# Altium PCB FEV-60_Motor_uC.PcbDoc
Units mil, origin at the board's own origin, x right, y up, seen from the top; angles counter-clockwise.
Board outline 2700 x 2125 mil, 2 copper layers (Top Layer, Bottom Layer); 35 components, 71 nets, 214 pads, 131 vias.
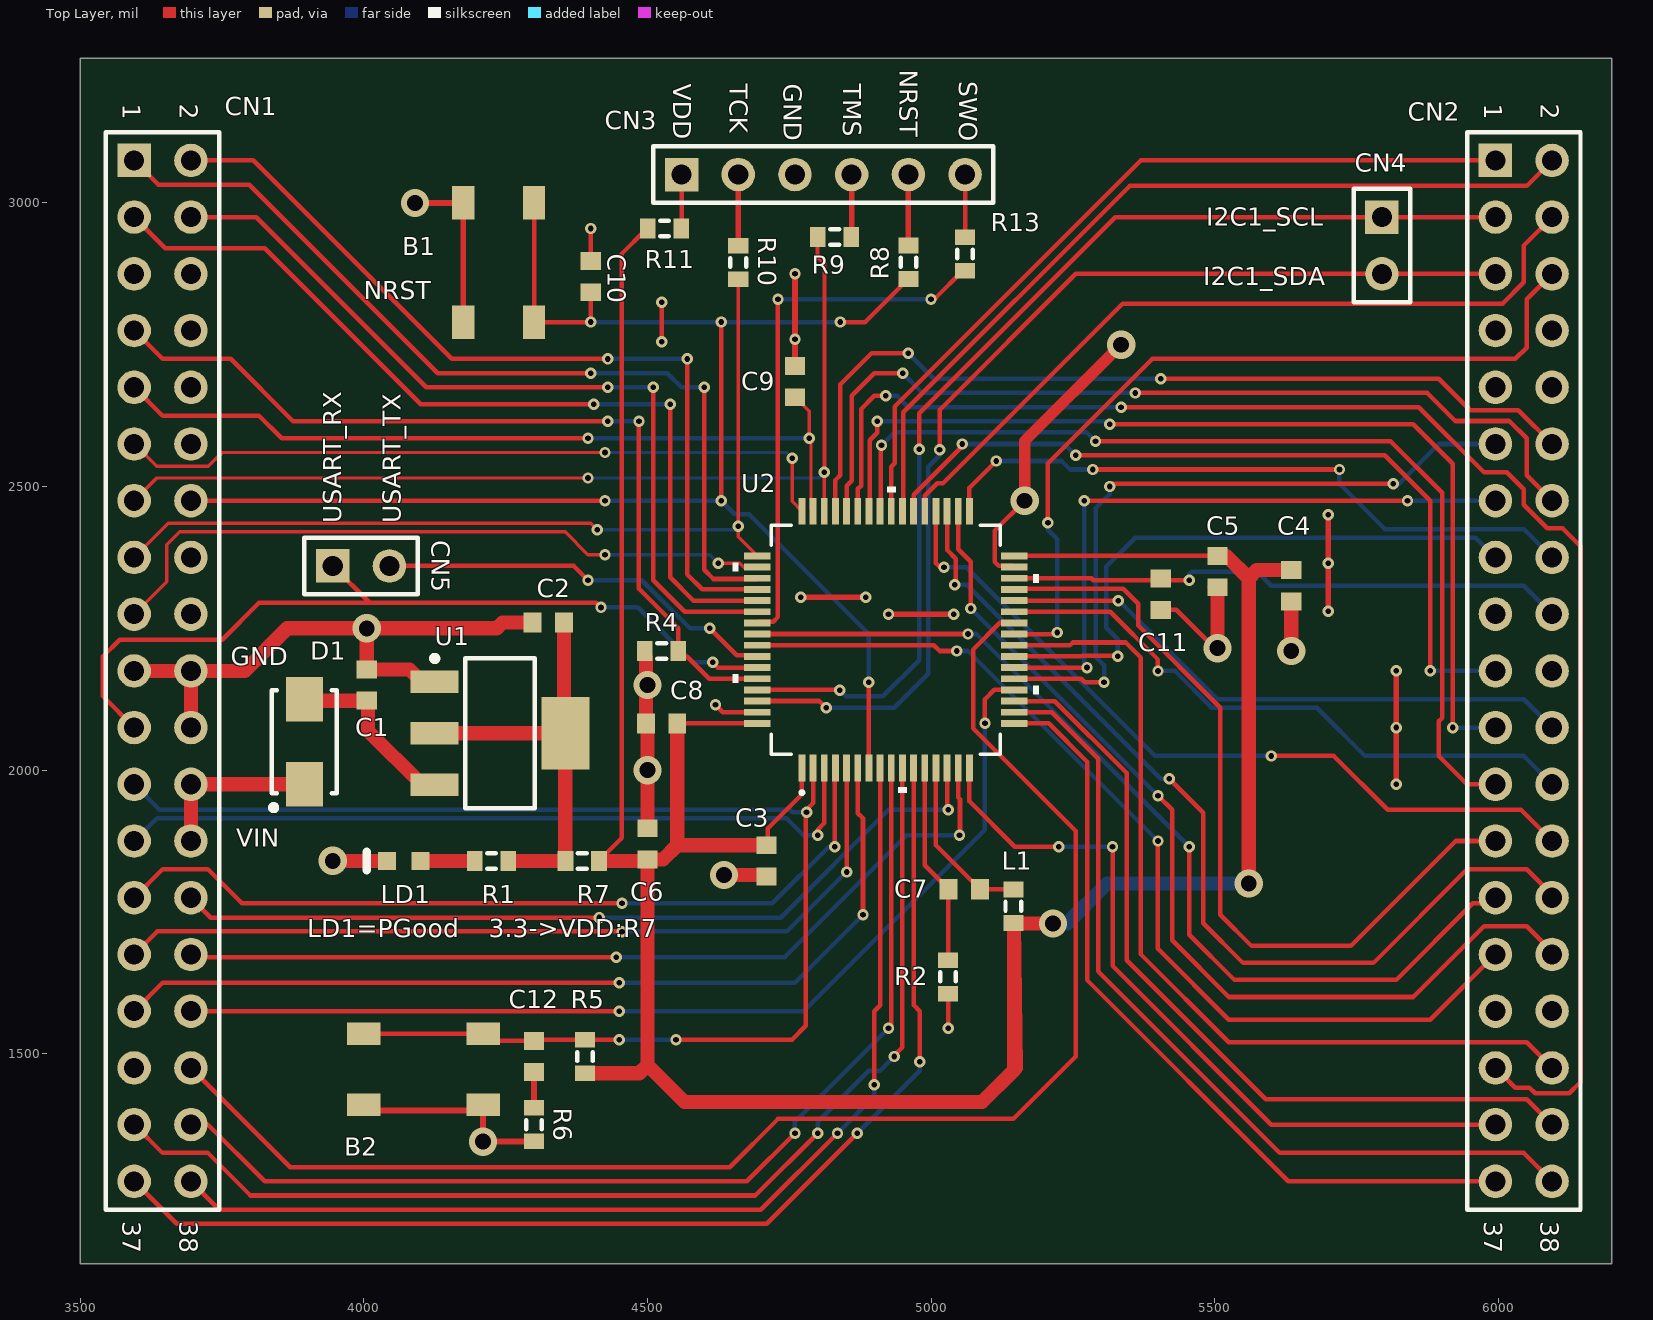
[diagram p0: Top Layer view]
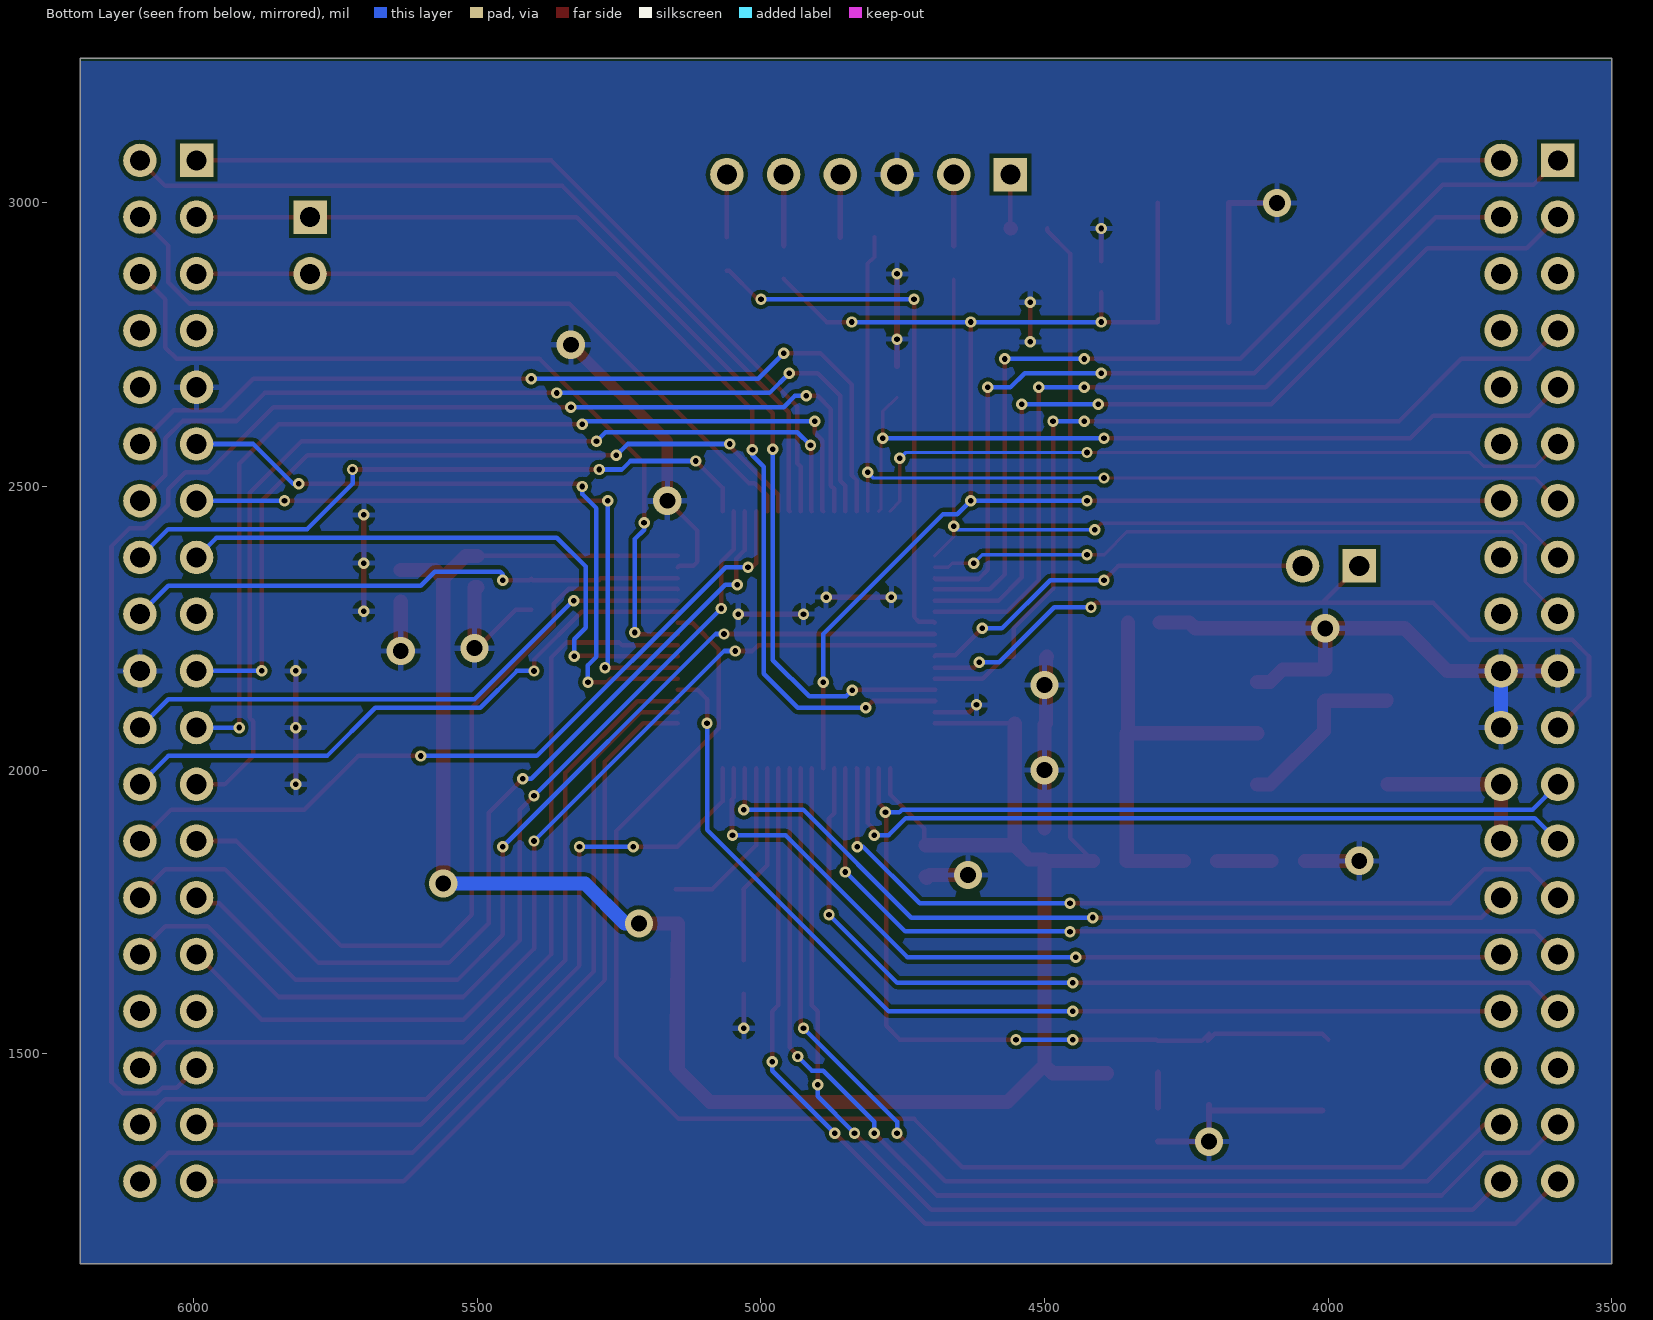
[diagram p1: Bottom Layer view, seen from below]

## Layer stack, top to bottom
Top Solder: solder mask 0.4, Solder Resist, Dk 3.5
Top Layer: signal copper 1.4
Dielectric 1: dielectric 12.6, FR-4, Dk 4.8
Bottom Layer: signal copper 1.4
Bottom Solder: solder mask 0.4, Solder Resist, Dk 3.5

## Board outline
3500,1130 3500,3255 6200,3255 6200,1130

## Design rules (kind name [scope] priority, off if disabled: settings)
Clearance [All] p1: gap=7 ignorepadtopadclearanceinfootprint=FALSE
HoleToHoleClearance [All] p1: gap=7 allowstackedmicrovias=TRUE
MinimumSolderMaskSliver [All] p1: minsoldermaskwidth=7
PolygonConnect [All] p1: connectstyle=Relief reliefconductorwidth=10 reliefentries=4 polygonreliefangle="90 Angle" airgapwidth=10
RoutingVias [All] p1: holewidth=28 width=50 viastyle="Through Hole" minholewidth=10 minwidth=20 maxholewidth=28 maxwidth=50
SilkToSilkClearance [All] p1: silktosilkclearance=8
SilkToSolderMaskClearance [IsPad] p1: minsilkscreentomaskgap=3.5 clearancetoexposedcopper=TRUE
SolderMaskExpansion [All] p1: expansion=4
Width [All] p1: maxlimit=50 minlimit=6 preferedwidth=10 minimp=50.000000 maximp=50.000000 favimp=50.000000
26 further rules are at their usual default settings.

## Components (designator, comment, footprint, x,y, rotation, side; value= is the part's Value field where it differs from the comment)
B1 "TD-0341 [RESET/Black]" Button 4175,2790 r90 top
B2 "USER (Blue)" Button 4210,1410 r180 top
C1 "Cap Semi" 1608[0603] 4005,2150 r270 top value=10uF
C2 "Cap Semi" 1608[0603] 4325,2260 r0 top value=10uF
C3 "Cap Semi" 1608[0603] 4710,1840 r90 top value=10uF
C4 "Cap Semi" 1608[0603] 5635,2325 r90 top value=10uF
C5 "Cap Semi" 1608[0603] 5505,2350 r90 top value=10uF
C6 "Cap Semi" 1608[0603] 4500,1870 r270 top value=10uF
C7 "Cap Semi" 1608[0603] 5058.58,1790 r0 top value=10uF
C8 "Cap Semi" 1608[0603] 4525,2082.36 r0 top value=10uF
C9 "Cap Semi" 1608[0603] 4760,2685 r270 top value=2.2uF
C10 "Cap Semi" 1608[0603] 4400,2870 r270 top value=100nF
C11 "Cap Semi" 1608[0603] 5405,2310 r90 top value=4.7uF
C12 "Cap Semi" 1608[0603] 4300,1495 r90 top value=100nF
CN1 "Header 19X2" HDR2X19 3595,3075 r270 top locked
CN2 "Header 19X2" HDR2X19 5995,3075 r270 top locked
CN3 "Header 6X1" HDR1X6 4560,3050 r0 top
CN4 "Header 2" HDR1X2 5795,2975 r270 top
CN5 "Header 2" HDR1X2 3945,2360 r0 top
D1 "STPS2L30A" STPS2L30A 3895,2050 r90 top
L1 "Res3" J1-0603 5145,1760 r90 top value=1K (schematic designator R?BEAD)
LD1 "HSMS-C190" AVAG-HSMX-C190_V 4070,1840 r180 top
R1 "Res3" J1-0603 4225,1840 r0 top value=1K
R2 "Res3" J1-0603 5030,1635.47 r90 top value=0
R4 "Res3" J1-0603 4525,2210 r0 top value=10K
R5 "Res3" J1-0603 4390,1495 r270 top value=4.7K
R6 "Res3" J1-0603 4300,1375 r90 top value=100
R7 "Res3" J1-0603 4385,1840 r180 top value=0
R8 "Res3" J1-0603 4960,2895.47 r270 top value=22
R9 "Res3" J1-0603 4830,2940 r180 top value=22
R10 "Res3" J1-0603 4660,2895 r270 top value=22
R11 "Res3" J1-0603 4530,2955 r180 top value=0
R13 "Res3" J1-0603 5060,2910 r270 top value=22
U1 "LD1117S33TR" LD1117S33TR 4240,2065 r0 top
U2 "MCU_LQFP64" STM32F030R8 4920,2230 r90 top

## Footprints (in the part's own frame and the unit in brackets; to place one, negate y for a bottom-side part, rotate by r counter-clockwise, add the part's x,y. Pads: shape width x height; smd on the part's side, far side on the other; paste and mask are expansions set on the pad)
1608[0603] [mm] "Chip Capacitor, Body 1.6x0.8mm, IPC High Density"
  rect 0.8x0.9 smd: 1(-0.7,0) 2(0.7,0)
  body extent -0.87,-0.48 0.87,0.48, height 1.3
AVAG-HSMX-C190_V [mm] "SMD, 2-Leads, Body 1.6x0.8mm, Height 0.9mm"
  rect 0.8x0.8 smd: 1(-0.75,0) 2(0.75,0)
  silkscreen extent 1.65,-0.4 1.65,0.4, body extent -0.8,-0.4 0.8,0.4, height 0.9
Button [mm]
  rect 1.5x1 smd: 1(0,0) 2(0,-3.175) 3(5.334,-3.175) 4(5.334,0)
HDR1X2 [mm] "Connector; Header; 2 Position"
  rect 1.5x1.5 hole 0.9: 1(0,0)
  round 1.5 hole 0.9: 2(2.54,0)
  silkscreen extent -1.27,-1.27 3.81,1.27
HDR1X6 [mm] "Connector; Header; 6 Position"
  rect 1.5x1.5 hole 0.9: 1(0,0)
  round 1.5 hole 0.9: 2(2.54,0) 3(5.08,0) 4(7.62,0) 5(10.16,0) 6(12.7,0)
  silkscreen extent -1.27,-1.27 13.97,1.27
HDR2X19 [mm] "Connector; Header; 19x2 Position"
  rect 1.5x1.5 hole 0.9: 1(0,0)
  round 1.5 hole 0.9: 2(0,2.54) 3(2.54,0) 4(2.54,2.54) 5(5.08,0) 6(5.08,2.54) 7(7.62,0) 8(7.62,2.54) 9(10.16,0) 10(10.16,2.54) 11(12.7,0) 12(12.7,2.54) 13(15.24,0) 14(15.24,2.54) 15(17.78,0) 16(17.78,2.54) 17(20.32,0) 18(20.32,2.54) 19(22.86,0) 20(22.86,2.54) 21(25.4,0) 22(25.4,2.54) 23(27.94,0) 24(27.94,2.54) 25(30.48,0) 26(30.48,2.54) 27(33.02,0) 28(33.02,2.54) 29(35.56,0) 30(35.56,2.54) 31(38.1,0) 32(38.1,2.54) 33(40.64,0) 34(40.64,2.54) 35(43.18,0) 36(43.18,2.54) 37(45.72,0) 38(45.72,2.54)
  silkscreen extent -1.27,-1.27 46.99,3.81
J1-0603 [mm] "Chip Resistor, Body 1.6x0.8mm, IPC High Density"
  rect 0.7x0.9 smd: 1(-0.75,0) 2(0.75,0)
  silkscreen extent -0.2,-0.35 0.2,0.35, body extent -0.85,-0.48 0.85,0.48, height 0.9
LD1117S33TR [mm] "SOT223, LDO 3.3V Converter"
  rect 2.15x1 smd: 1(-2.925,2.3) 2(-2.925,0) 3(-2.925,-2.3)
  rect 2.15x3.25 smd: 4(2.925,0)
  silkscreen extent -3.05,-3.35 1.55,3.47, body extent -3.5,-3.35 3.5,3.35, height 1.8
STM32F030R8 [mil]
  rect 47x12 smd: 1(-226.38,147.64) 2(-226.38,127.95) 3(-226.38,108.27) 4(-226.38,88.58) 5(-226.38,68.9) 6(-226.38,49.21) 7(-226.38,29.53) 8(-226.38,9.84) 9(-226.38,-9.84) 10(-226.38,-29.53) 11(-226.38,-49.21) 12(-226.38,-68.9) 13(-226.38,-88.58) 14(-226.38,-108.27) 15(-226.38,-127.95) 16(-226.38,-147.64) 33(226.38,-147.64) 34(226.38,-127.95) 35(226.38,-108.27) 36(226.38,-88.58) 37(226.38,-68.9) 38(226.38,-49.21) 39(226.38,-29.53) 40(226.38,-9.84) 41(226.38,9.84) 42(226.38,29.53) 43(226.38,49.21) 44(226.38,68.9) 45(226.38,88.58) 46(226.38,108.27) 47(226.38,127.95) 48(226.38,147.64)
  rect 12x47 smd: 17(-147.64,-226.38) 18(-127.95,-226.38) 19(-108.27,-226.38) 20(-88.58,-226.38) 21(-68.9,-226.38) 22(-49.21,-226.38) 23(-29.53,-226.38) 24(-9.84,-226.38) 25(9.84,-226.38) 26(29.53,-226.38) 27(49.21,-226.38) 28(68.9,-226.38) 29(88.58,-226.38) 30(108.27,-226.38) 31(127.95,-226.38) 32(147.64,-226.38) 49(147.64,226.38) 50(127.95,226.38) 51(108.27,226.38) 52(88.58,226.38) 53(68.9,226.38) 54(49.21,226.38) 55(29.53,226.38) 56(9.84,226.38) 57(-9.84,226.38) 58(-29.53,226.38) 59(-49.21,226.38) 60(-68.9,226.38) 61(-88.58,226.38) 62(-108.27,226.38) 63(-127.95,226.38) 64(-147.64,226.38)
  silkscreen extent -273,-270 270,270, body extent -236,-236 236,236, height 63
STPS2L30A [mm] "SODFL, Shottkey Diode"
  rect 2x1.65 smd: 1(-1.9,0) 2(1.9,0)
  silkscreen extent -3.07,-1.45 2.3,1.5, body extent -2.54,-1.45 2.54,1.45, height 2.45

## Part data
B1 B2: library part "SW PUSHBUTTON", "SE PUSHBUTTON"
C1 C2 C3 C4 C5 C6 C7 C8 C9 C10 C11 C12: "Capacitor (Semiconductor SIM Model)", LatestRevisionDate=29-May-2009, LatestRevisionNote="IPC-7351 Footprint Added.", PackageDescription="Chip Capacitor", PackageReference=C1206, Published=8-Jun-2000, Publisher="Altium Limited"
CN1 CN2: "Header, 19-Pin, Dual row", Publisher="Altium Limited", Revision="17-Jul-2002: Re-released for DXP Platform."
CN3: "Header, 6-Pin, Single row", LatestRevisionDate=17-Jul-2002, LatestRevisionNote="Re-released for DXP Platform.", Publisher="Altium Limited"
CN4 CN5: "Header, 2-Pin", LatestRevisionDate=17-Jul-2002, LatestRevisionNote="Re-released for DXP Platform.", Publisher="Altium Limited"
D1: Manuf_1=STM, Manuf_Part_1=BAT60JFILM, Distrib=ST, ECCN_US/EU=EAR99/NEC, Order=BAT60JFILM, Provided=ST, Revision="July-2002: Re-released for DXP Platform."
L1 R1 R2 R4 R5 R6 R7 R8 R9 R10 R11 R13: "Resistor", LatestRevisionDate=29-May-2009, LatestRevisionNote="IPC-7351 Footprint Added.", PackageDescription="Chip Resistor", PackageReference=J1-0603, Published=8-Jun-2000, Publisher="Altium Limited"
LD1: library part CMP-2000-06427-1, "LED Uni-Color Red, 52 mW, 20 mA, -40 to 85 degC, 2-Pin SMD, RoHS, Tape and Reel", Emitting Color=Red, Forward Current=25mA, Forward Voltage=2.6V, Manufacturer=Avago, Operating Temperature Classification=Industrial, Operating Temp Range=-40Cto85C, Package Description="2-Pin Surface Mount Device, Body 1.6 x 0.8 mm, Height 0.9 mm", Package Reference=HSMX-C190, Package Type=ChipLed, Power Dissipation=52W, Reverse Voltage=5V, Test Current (It)=20mA, Chip Material=GaP, Datasheet URL=http://docs.avagotech.com/docs/AV02-0551EN, Datasheet Version=03/2012, DELETED=Compliant, Dominant Wave Length=626nm, High Brightness=No, Lens Dimensions=1x0.8x0.5mm, Lens Type=ColorlessDiffused, Luminous Intensity=10mcd, Lum Intensity=10mcd, Main Category=ChipLED, Manufacturer URL=http://www.avagotech.com/, Mounting=SurfaceMount, Mounting Technology=SurfaceMount, Number of  Elements=1, Packaging=TapeandReel, Peak Wavelength=630nm, Pin Count=2, Product Depth (mm)=0.8mm, Product Height (mm)=0.8mm, Product Length (mm)=1.6mm, Rad Hardened=No, Shape Type=Rectangular, Type=Uni-Color, Viewing Angle=170deg
U1: library part LD1117

## Via types
v1: diameter 20, hole 10, Top Layer to Bottom Layer, 105 vias
v2: diameter 50, hole 28, Top Layer to Bottom Layer, 13 vias
v3: diameter 20, hole 10, Top Layer to Bottom Layer, tented both sides, 13 vias

## Nets (pads, with @x,y where several pads share a name; then routed paths per layer and width w, separated by ;. In a path a pad name is that pad's centre, name@x,y a point inside that pad or via, vN(x,y) a via of type N, cw(c..) or ccw(c..) an arc to the next point about the centre after c; other vN are vias at no path point)
+3V3: C2.2 R1.2 R7.2 U1.2 U1.4 | length 752.4
  Top Layer w25: U1.2 4355,2065 4355,1840.47 R7.2 R1.2 ; C2.2 4352.56,2067.6 U1.4
AGND: C7.1 R2.2 U2.12 | length 356.5
  Top Layer w8: U2.12 4988.9,1832.13 C7.1 5030,1788.98 R2.2
AVDD: C7.2 L1.2 U2.13 | length 309.6
  Top Layer w8: U2.13 5008.58,1867.56 C7.2 L1.2@5150,1790
BOOT0: CN1.7 R4.2 U2.60 | length 1565.3
  Top Layer w8: CN1.7 3645,2725 3765,2725 3875,2615 v1(4430,2615) ; v1(4485,2615) 4485,2320 4554.53,2250.47 4554.53,2200 4570,2200 4608.9,2161.1 U2.60
  Bottom Layer w8: CN1.7@3595,2765 CN1.7 ; v1(4430,2615) v1(4485,2615)
GND: B1.1 B1.4 B2.1 B2.4 C1.1 C2.1 C3.1 C4.1 C5.1 C6.1 C8.1 C9.1 C10.1 C11.1 CN1.19 CN1.20 CN1.22 CN2.9 CN2.20 CN3.3 LD1.2 R2.1 R4.1 R6.1 U1.1 U2.31 U2.63 | length 4133.5
  Top Layer w8: C10.1 v1(4400,2955) ; v1(4525,2755) v1(4525,2825) ; v1(4620,2115) 4632.95,2102.05 U2.63 ; v1(5030,1545) R2.1 ; U2.31 5144.38,2359.95 5119.01,2359.95 5111.88,2367.08 5111.88,2421.88 v2(5165,2475) ; C11.1 5432.56,2282.44 5500,2215 v2(5505,2215)
  Top Layer w10: B2.4@4009.84,1400 B2.1@4210,1400 ; v2(4090,3000) B1.4 B1.1 ; B2.1 v2(4210,1345) 4210.24,1345.24 4299.76,1345.24 R6.1 ; C9.1 v1(4760,2759.84) v1(4760,2875) ; v3(4770,2305) v3(4885,2305) ; v3(4925,2275) v3(5040,2275) ; v1(5700,2280) v1(5700,2365) v1(5700,2450) ; v1(5820,1975) v1(5820,2075) v1(5820,2175)
  Top Layer w20: v2(5165,2475) 5165,2580 v2(5335,2750)
  Top Layer w25: CN1.19 CN1.20 ; CN1.22 CN1.20 ; v2(3945,1840) LD1.2 ; U1.1 4102.2,2155.55 4080.2,2177.56 C1.1 v2(4005,2250) ; C2.1 4244.19,2260 4234.19,2250 v2(4005,2250) ; R4.1@4495.47,2200 4497.44,2198.03 C8.1 4500,2079.8 v2(4500,2000) C6.1 ; v2(4635,1815) 4702.56,1815 4707.56,1810 C3.1 ; v2(5505,2215) C5.1 ; v2(5635,2210) C4.1 ; CN1.20 3790,2175 3865,2250 v2(4005,2250)
  Bottom Layer w25: CN1.22 CN1.20
  other v2: 4500,2150
NetC1_2: C1.2 D1.2 U1.3 | length 321.9
  Top Layer w20: D1.2 D1.2@3897.36,2122.44
  Top Layer w25: D1.2@3897.36,2122.44 C1.2 4007.46,2119.98 4007.46,2069.19 4102.2,1974.45 U1.3
NetC12_1: C12.1 R6.2 | length 63.3
  Top Layer w8: C12.1@4299.53,1466.97 C12.1
  Top Layer w10: C12.1@4299.53,1466.97 4300,1466.5 R6.2
NetCN3_1: CN3.1 R11.1 | length 95.7
  Top Layer w8: R11.1@4560,2955.47 4560,2999.53 CN3.1
  Top Layer w25: R11.1@4560,2955 R11.1 R11.1@4560,2955.47
NetCN3_2: CN3.2 R10.1 | length 125.5
  Top Layer w10: R10.1 CN3.2
NetCN3_4: CN3.4 R9.1 | length 110
  Top Layer w10: R9.1@4860,2940 CN3.4
NetCN3_5: CN3.5 R8.1 | length 125
  Top Layer w10: R8.1 CN3.5
NetCN3_6: CN3.6 R13.1 | length 110.5
  Top Layer w8: R13.1 CN3.6
NetLD1_1: LD1.1 R1.1 | length 95.9
  Top Layer w25: LD1.1 R1.1
NRST: B1.2 B1.3 C10.2 CN1.14 R8.2 U2.7 | length 2802.8
  Top Layer w8: CN1.14 v1(4425,2475) ; B1.3 B1.2 v1(4400,2790) C10.2 ; v1(4630,2475) v1(4630,2790) ; v1(4840,2790) 4884.06,2790 R8.2 ; v3(4890,2155) 4890.24,2154.76 4890.24,2003.86 U2.7
  Bottom Layer w8: v1@4395,2790 v1(4630,2790) v1(4840,2790) ; v1(4425,2475) v1(4630,2475) 4654,2451 4679,2451 4890,2240 v3(4890,2155)
PA0: CN1.28 U2.14 | length 1502.5
  Top Layer w8: CN1.28 3730,1740 v1(4415,1740) ; U2.14 5028.27,1931.73 v1(5030,1930)
  Bottom Layer w8: v1(4415,1740) 4735,1740 4925,1930 v1(5030,1930)
PA1: CN1.30 U2.15 | length 1566.4
  Top Layer w8: CN1.30 3700,1670 v1(4445,1670) ; U2.15 5047.95,1951.75 5051,1948.7 5051,1886 v1(5050,1885)
  Bottom Layer w8: v1(4445,1670) 4741.62,1670 4956.62,1885 v1(5050,1885)
PA2: CN2.35 U2.16 | length 1345.1
  Top Layer w8: U2.16 5067.64,1945 5147.64,1865 v1(5225,1865) ; v1(5320,1865) 5320,1655 5600,1375 CN2.35
  Bottom Layer w8: v1(5225,1865) v1(5320,1865)
PA3: CN2.37 U2.17 | length 1408.6
  Top Layer w8: U2.17 5207.64,2082.36 5275,2015 5275,1630 5630,1275 CN2.37
PA4: CN1.32 U2.20 | length 1820.7
  Top Layer w8: CN1.32 v1(4450,1575) ; v3(5095,2082.36) 5095,2125 5111.42,2141.42 U2.20
  Bottom Layer w8: v1(4450,1575) 4775,1575 5095,1895 v3(5095,2082.36)
PA5: CN2.11 U2.21 | length 1233.8
  Top Layer w8: U2.21 5264.99,2161.1 5271.09,2155 v1(5305,2155) ; v1(5315,2500) 5320,2505 v1(5815,2505)
  Bottom Layer w8: v1(5305,2155) 5305,2185 5290,2200 5290,2461.72 5315,2486.72 v1(5315,2500) ; v1(5815,2505) 5825,2505 5895,2575 CN2.11
PA6: CN2.13 U2.22 | length 1140
  Top Layer w8: U2.22 5146.69,2180.47 5265,2180.47 ; v1(5270,2475) v1(5840,2475)
  Bottom Layer w8: v1(5270,2475) 5270,2185.79 v1(5275,2180.79) ; v1(5840,2475) CN2.13
PA7: CN2.15 U2.23 | length 1071.7
  Top Layer w8: U2.23 5255.63,2200.47 5255.94,2200.79 5265.3,2200.79 5266.3,2201.79 5328.21,2201.79 v1(5329.11,2200.89)
  Bottom Layer w8: v1(5329.11,2200.89) 5329.11,2230.89 5309,2251 5309,2359 5360,2410 5960,2410 CN2.15
PA8: CN2.23 U2.41 | length 1746.8
  Top Layer w8: U2.41 4911.37,2457.59 4911.37,2571.37 v1(4912.58,2572.58) ; v1(5290,2580) 5810,2580 5901,2489 5901,2092 5895,2086 5895,2025 5945,1975 CN2.23
  Bottom Layer w8: v1(4912.58,2572.58) 4936,2596 5274,2596 v1(5290,2580)
PA9: CN2.21 U2.42 | length 1750.7
  Top Layer w8: U2.42 4891.58,2457.48 4891.58,2581.58 4905,2595 v1(4905,2615) ; v1(5315,2610) 5850,2610 5920,2540 v1(5920,2075)
  Bottom Layer w8: v1(4905,2615) 5310,2615 v1(5315,2610) ; v1(5920,2075) CN2.21
PA10: CN2.33 U2.43 | length 2708.4
  Top Layer w8: U2.43 4870.79,2495.79 4876.58,2501.58 4876.58,2636.58 4900,2660 v1(4920,2660) ; v1(5335,2640) 5860,2640 5975,2525 6015,2525 6045,2495 6045,2467.69 6086.08,2426.61 6113.39,2426.61 6145,2395 6145,1450 6125,1430 6065,1430 6055,1440 6030,1440 CN2.33
  Bottom Layer w8: v1(4920,2660) 4940,2660 4960,2640 v1(5335,2640)
PA11: CN2.14 U2.44 | length 1590.2
  Top Layer w8: U2.44 4851.1,2501.1 4860,2510 4860,2660 4900,2700 v1(4950,2700) ; v1(5360,2665) 5875,2665 5924.47,2615.53 6019.47,2615.53 6050,2585 6050,2520 CN2.14
  Bottom Layer w8: v1(4950,2700) 4985,2665 v1(5360,2665)
PA12: CN2.12 U2.45 | length 1571.2
  Top Layer w8: U2.45 4831.42,2511.42 4840,2520 4840,2680 4895,2735 v1(4960,2735) ; v1(5405,2690) 5895,2690 5950.53,2634.47 6035.53,2634.47 CN2.12
  Bottom Layer w8: v1(4960,2735) 5005,2690 v1(5405,2690)
PA15: CN1.17 U2.50 | length 1222.5
  Top Layer w6: CN1.17 3652.5,2332.5 3652.5,2397.5 3675,2420 4355,2420 4395,2380 v1(4425,2380) ; v1(4625,2365) 4662.62,2365 4669.66,2357.95 U2.50
  Bottom Layer w6: v1(4425,2380) 4610,2380 v1(4625,2365)
PB0: CN1.34 U2.26 | length 2597.6
  Top Layer w8: CN1.34 3870,1300 4645,1300 4730,1385 5145,1385 5255,1495 5255,1892.66 5074,2073.66 5074,2212.52 5121.01,2259.53 U2.26
PB1: CN2.24 U2.27 | length 1086.7
  Top Layer w8: U2.27@5146.69,2278.9 U2.27 5315.79,2279.21 5400,2195 v1@5400,2175
  Bottom Layer w8: v1(5400,2174.84) 5430.16,2174.84 5495,2110 5680,2110 5765,2025 6045,2025 CN2.24
PB2: CN2.22 U2.28 | length 1041.8
  Top Layer w8: U2.28 v1(5330,2298.9)
  Bottom Layer w8: v1@5330,2300 5505,2125 6045,2125 CN2.22
PB3: R13.2 U2.55 | length 951.6
  Top Layer w8: U2.55 4695.62,2261.53 4721.53,2261.53 4730,2270 v1(4730,2830) ; v1(5000,2830) 5002.3,2832.3 5007.89,2832.3 5056.06,2880.47 R13.2
  Bottom Layer w8: v1(4730,2830) v1(5000,2830)
PB4: CN2.27 U2.56 | length 1705
  Top Layer w8: U2.56 4693.78,2240 v3(5065,2240) ; v1(5455,1865) 5455,1710 5535,1630 5820,1630 5955.23,1765.23 5985.23,1765.23 CN2.27
  Bottom Layer w8: v3(5065,2240) 5080,2240 v1(5455,1865)
PB5: CN2.29 U2.57 | length 1733.9
  Top Layer w6: U2.57 U2.57@4693.76,2220.3
  Top Layer w8: U2.57@4693.76,2220.3 5004.7,2220.3 5015,2210 v3(5045,2210) ; v1(5400,1875) 5400,1685 5525,1560 5880,1560 CN2.29
  Bottom Layer w8: v3(5045,2210) 5065,2210 v1(5400,1875)
PB6: CN5.2 U2.58 | length 714.7
  Top Layer w8: CN5.2 4370,2360 v1(4395,2335) ; v1(4610,2250) 4657.53,2202.47 4691.62,2202.47 U2.58
  Bottom Layer w8: v1(4395,2335) 4490,2335 4575,2250 v1(4610,2250)
PB7: CN1.21 CN5.1 U2.59 | length 1480.2
  Top Layer w8: CN1.21 3540,2130 3540,2200.31 3569.69,2230 3750,2230 3815,2295 4010,2295 ; CN5.1 4010,2295 ; v1(4418.14,2286.86) 4410,2295 4010,2295 ; v1(4615,2190) 4624.21,2180.79 U2.59
  Bottom Layer w8: v1(4418.14,2286.86) 4483.14,2286.86 4580,2190 v1(4615,2190)
PB8: CN2.3 CN4.1 U2.61 | length 1911
  Top Layer w8: U2.61@4692.66,2141.56 4729.99,2141.56 ; 4729.99,2141.73 4838.27,2141.73 v3(4839.13,2140.87) ; v1(4979,2566) 4979,2629 5325,2975 CN4.1 CN2.3
  Bottom Layer w8: v3(4839.13,2140.87) 4850,2130 4915,2130 4979,2194 v1@4979,2565
PB9: CN2.5 CN4.2 U2.62 | length 1884.9
  Top Layer w8: U2.62@4692.66,2121.87 4803.13,2121.87 v3(4815,2110) ; v1(5015,2565) 5015,2635 5255,2875 CN4.2 CN2.5
  Bottom Layer w8: v3(4815,2110) 4935.14,2110 4995,2169.86 4995,2535 5015,2555 v1(5015,2565)
PB10: CN2.25 U2.29 | length 1423.1
  Top Layer w8: U2.29 5147.69,2319.9 5338.7,2319.9 5365,2293.6 5365,2255 5510,2110 5510,1745 5565,1690 5740,1690 5925,1875 CN2.25
PB11: C11.2 CN2.18 U2.30 | length 995.4
  Top Layer w8: U2.30 5146.69,2337.95 5283.28,2337.95 5286.24,2335 5402.44,2335 C11.2 5407.56,2335 v1(5455,2335)
  Bottom Layer w8: v1(5455,2335) 5455,2345.28 5459.72,2350 5575,2350 5600,2325 6045,2325 CN2.18
PB12: CN2.16 U2.33 | length 1173.3
  Top Layer w8: U2.33 5067.64,2497.64 v1(5115,2545) ; v1(5285,2530) v1(5720,2530)
  Bottom Layer w8: v1(5115,2545) 5230,2545 5245,2530 v1(5285,2530) ; v1(5720,2530) 5720,2505 5800,2425 6045,2425 CN2.16
PB13: CN2.30 U2.34 | length 1699.4
  Top Layer w8: U2.34 5047.95,2389.5 5070,2367.45 v3(5070,2285) ; v1(5400,1955) 5425,1930 5425,1700 5525,1600 5850,1600 5975,1725 6050,1725 6095,1680 CN2.30
  Bottom Layer w8: v3(5070,2285) v1(5400,1955)
PB14: CN2.28 U2.35 | length 1672.2
  Top Layer w8: U2.35 5028.27,2387.97 5043.81,2372.42 5043.81,2328.82 v3(5041.91,2326.91) ; v1(5420,1985) 5480,1925 5480,1730 5550,1660 5780,1660 5945,1825 6050,1825 6095,1780 CN2.28
  Bottom Layer w8: v3(5041.91,2326.91) 5063.09,2326.91 5405,1985 v1(5420,1985)
PB15: CN2.26 U2.36 | length 1380.8
  Top Layer w8: U2.36 5008.58,2365 5015.63,2357.95 v3(5022.81,2357.95) ; v1(5600,2025) 5710,2025 5805,1930 6040,1930 CN2.26
  Bottom Layer w8: v3(5022.81,2357.95) 5062.05,2357.95 5395,2025 v1(5600,2025)
PC0: CN1.38 U2.8 | length 1891.4
  Top Layer w8: CN1.38 3745,1225 4700,1225 v1(4835,1360) ; v1(4900,1445) 4900,1575 4910.16,1585.16 U2.8
  Bottom Layer w8: v1(4835,1360) 4900,1425 v1(4900,1445)
PC1: CN1.36 U2.9 | length 1848.6
  Top Layer w8: CN1.36 3725,1375 3825,1275 4675,1275 v1(4760,1360) ; v1@4929.84,1550 U2.9
  Bottom Layer w8: v1(4760,1360) 4760,1380 v1(4925,1545)
PC2: CN1.35 U2.10 | length 2019.7
  Top Layer w8: CN1.35 3645,1325 3725,1325 3800,1250 4690.15,1250 v1(4800,1359.85) ; v1(4935,1495) 4935,1497.06 4949.53,1511.59 U2.10
  Bottom Layer w8: v1(4800,1359.85) 4800,1380 4890,1470 4910,1470 v1(4935,1495)
PC3: CN1.37 U2.11 | length 2066
  Top Layer w8: CN1.37 3670,1200 4710,1200 v1(4870,1360) ; U2.11 4969.21,1585.79 4980,1575 v1(4980,1485.79)
  Bottom Layer w8: v1(4870,1360) 4980,1470 v1(4980,1485.79)
PC4: CN2.34 U2.24 | length 1568.1
  Top Layer w8: U2.24 5146.69,2219.84 5244.84,2219.84 5250,2225 5343.27,2225 5370,2198.27 5370,1675 5525,1520 6050,1520 CN2.34
PC5: CN2.6 U2.25 | length 1459.5
  Top Layer w8: U2.25 5219.84,2239.84 v1(5222.53,2242.53) ; v1(5206,2436) 5206,2540.7 5390.3,2725 6030,2725 6050,2745 6050,2830 CN2.6
  Bottom Layer w8: v1(5206,2436) 5206,2424 5222.53,2407.47 v1(5222.53,2242.53)
PC6: CN2.4 U2.37 | length 1375.1
  Top Layer w8: U2.37 4988.9,2483.9 5011,2506 5021,2506 5337.56,2822.56 6007.56,2822.56 6045,2860 6045,2925 CN2.4
PC7: CN2.19 U2.38 | length 1435.6
  Top Layer w8: U2.38 4969.21,2485.43 5055,2571.21 v1(5055,2575) ; v1(5255,2555) 5800,2555 5880,2475 v1(5880,2175)
  Bottom Layer w8: v1(5055,2575) 5235,2575 v1(5255,2555) ; v1(5880,2175) CN2.19
PC8: CN2.2 U2.39 | length 1503.1
  Top Layer w8: U2.39 4951,2457.85 4951,2631 5350,3030 6050,3030 CN2.2
PC9: CN2.1 U2.40 | length 1425.9
  Top Layer w8: U2.40 4929.84,2534.84 4936,2541 4936,2641 5370,3075 CN2.1
PC10: CN1.1 U2.51 | length 1593.4
  Top Layer w8: CN1.1 3637.76,3032.24 3797.76,3032.24 4130,2700 v1(4400,2700) ; v1(4600,2675) 4600,2353.25 4616.3,2336.95 4692.31,2336.95 U2.51
  Bottom Layer w8: v1(4400,2700) 4535,2700 4560,2675 v1(4600,2675)
PC11: CN1.2 U2.52 | length 1534.5
  Top Layer w8: CN1.2 3805,3075 4155,2725 v1(4430,2725) ; v1(4570,2725) 4570,2345 4596.42,2318.58 U2.52
  Bottom Layer w8: v1(4430,2725) v1(4570,2725)
PC12: CN1.3 U2.53 | length 1557.3
  Top Layer w8: CN1.3 3649.88,2920.12 3824.88,2920.12 4100,2645 v1(4405,2645) ; v1(4540,2645) 4540,2340 4581.1,2298.9 U2.53
  Bottom Layer w8: v1(4405,2645) v1(4540,2645)
PC13: B2.2 B2.3 C12.2 CN1.23 R5.1 U2.2 | length 2472.9
  Top Layer w8: B2.3@4000,1525 4010,1535 4200,1535 B2.2@4212.44,1522.56 ; B2.2 4222.44,1522.56 C12.2 4301.97,1524.53 R5.1 4390.32,1524.84 v1(4450,1524.84) ; v1(4550.16,1524.84) 4754.84,1524.84 4779,1549 4779,1924 v1(4780.5,1925.5) 4780.5,1930.5 4792.05,1942.05 U2.2
  Bottom Layer w8: CN1.23 3639.47,1930.53 4750.69,1930.53 4755.71,1925.5 v1(4780.5,1925.5) ; v1(4450,1524.84) v1(4550.16,1524.84)
PC14: CN1.25 U2.3 | length 1357.9
  Top Layer w8: v1(4800,1885) 4800,1895 4811.73,1906.73 U2.3
  Bottom Layer w8: CN1.25 3635.53,1915.53 4744.47,1915.53 4775,1885 v1(4800,1885)
PC15: CN1.27 U2.4 | length 1461.2
  Top Layer w8: CN1.27 3645,1825 3725,1825 3785,1765 v1(4455,1765) ; v1(4830,1865) 4830,2002.2 U2.4
  Bottom Layer w8: v1(4455,1765) 4720,1765 4820,1865 v1(4830,1865)
PD2: CN1.4 U2.54 | length 1486
  Top Layer w8: CN1.4 3810,2975 4110,2675 v1(4430,2675) ; v1(4510,2675) 4510,2335 4565.79,2279.21 U2.54
  Bottom Layer w8: v1(4430,2675) v1(4510,2675)
PF0: CN1.29 U2.5 | length 1500.2
  Top Layer w8: CN1.29 3635.53,1715.53 4454.47,1715.53 v1(4455,1715) ; U2.5 4851.42,2003.31 v1(4851.42,1820.31)
  Bottom Layer w8: v1(4455,1715) 4455.53,1715.53 4745.53,1715.53 v1@4850.87,1820.87
PF1: CN1.31 U2.6 | length 1617.9
  Top Layer w8: CN1.31 3645,1625 v1(4450,1625) ; U2.6 4870.79,1924.21 4880,1915 v1(4880,1745)
  Bottom Layer w8: v1(4450,1625) 4760,1625 v1(4880,1745)
PF4: CN2.38 U2.18 | length 1510.9
  Top Layer w8: U2.18 5212.95,2102.05 5295,2020 5295,1645 5615,1325 6045,1325 CN2.38
PF5: CN2.36 U2.19 | length 1451.2
  Top Layer w8: U2.19 5218.27,2121.73 5345,1995 5345,1665 5590,1420 6050,1420 CN2.36
PF6: C9.2 CN1.9 U2.47 | length 1441.6
  Top Layer w6: C9.2 4785,2632.44 v1(4785,2585) 4788.36,2581.64 4788.36,2460.06 U2.47
  Top Layer w8: CN1.9 3645,2625 3815,2625 3855,2585 v1(4395,2585)
  Bottom Layer w8: v1(4395,2585) v1(4785,2585)
PF7: CN1.11 U2.48 | length 1291.5
  Top Layer w6: CN1.11 3634.53,2535.47 3725.47,2535.47 3750,2560 v1(4425,2560) ; v1(4755,2550) 4755,2473.74 U2.48
  Bottom Layer w6: v1(4425,2560) 4745,2560 v1(4755,2550)
TCK: CN1.15 R10.2 U2.49 | length 1598.9
  Top Layer w6: CN1.15 3655,2435 4400,2435 v1(4411.24,2423.76) ; R10.2 v1(4660,2430) 4660,2411.26 U2.49
  Bottom Layer w6: v1(4411.24,2423.76) 4653.76,2423.76 v1(4660,2430)
TMS: CN1.13 R9.2 U2.46 | length 1725.9
  Top Layer w6: CN1.13 3635,2515 v1(4395,2515) ; U2.46 v1(4811.73,2525)
  Top Layer w7: R9.2@4800,2940 4800,2905 4811.73,2893.27 v1(4811.73,2525)
  Bottom Layer w6: v1(4395,2515) 4801.73,2515 v1(4811.73,2525)
VDD: C3.2 C4.2 C5.2 C6.2 C8.2 L1.1 R5.2 R7.1 R11.2 U2.1 U2.32 U2.64 | length 5152.8
  Top Layer w8: R7.1 4455,1880.47 4455,2910.83 4495.24,2951.06 R11.2@4495.24,2955 ; C8.2 U2.64 ; C3.2 4712.44,1870 4712.44,1897.44 4772.36,1957.36 U2.1 ; U2.32 5146.69,2377.95 5419.61,2377.95 5420,2377.56 ; 5420,2377.95 C5.2@5499.61,2377.95
  Top Layer w25: R5.2 4485.47,1465.47 4500,1480 ; R7.1 4497.56,1840 C6.2 ; C8.2 4552.56,1867.56 ; C3.2 4552.56,1867.56 ; 5150,1475 L1.1@5145.94,1729.53 ; v2(5215,1729.53) L1.1@5145.94,1729.53 ; C5.2@5500,2377.56 C5.2 5520.71,2377.56 5560,2338.27 ; v2(5560,1800) 5560,2338.27 ; C4.2 5574.29,2352.56 5560,2338.27 ; 4500,1480 4565,1415 5090,1415 5145.94,1470.94 L1.1@5145.94,1729.53 ; 4500,1480 C6.2 ; C6.2 4527.44,1842.44 4552.56,1867.56
  Bottom Layer w25: v2@5215,1730 5240,1730 5310,1800 v2(5560,1800)
VIN: CN1.24 CN1.26 D1.1 | length 300
  Top Layer w25: CN1.26 CN1.24 D1.1@3895,1975
pads on no net: CN1.5 CN1.6 CN1.8 CN1.10 CN1.12 CN1.16 CN1.18 CN1.33 CN2.7 CN2.8 CN2.10 CN2.17 CN2.31 CN2.32

## Polygon pours and split planes (outlines as drawn)
GND on Bottom Layer "Bottom Layer-No Net" (solid, pour order 2): 3500,3250 6200,3250 6200,1130 3500,1130

## Silkscreen, mask and mechanical layers (free items; w line width, h text height)
Top Overlay:
  text "NRST" at 4945,3235 h32 r270
  text "SWO" at 5050,3215 h32 r270
  text "VDD" at 4545,3210 h32 r270
  text "TCK" at 4645,3210 h32 r270
  text "GND" at 4740,3210 h32 r270
  text "TMS" at 4845,3210 h32 r270
  text "I2C1_SCL" at 5485,2960 h32
  text "I2C1_SDA" at 5480,2855 h32
  text "NRST" at 4000,2830 h32
  text "USART_RX" at 3960,2435 h32 r90
  text "USART_TX" at 4065,2435 h32 r90
  text "GND" at 3765,2185 h32
  text "VIN" at 3775,1865 h32
  text "LD1=PGood" at 3900,1705 h32
  text "3.3->VDD:R7" at 4220,1705 h32
Mechanical 5:
  the board outline again, w10

## Text inside footprints (layer, text, board x,y; h text height)
CN1: Top Overlay "38" at 3675,1205 h32 r270; Top Overlay "37" at 3575,1205 h32 r270; Top Overlay "1" at 3575,3175 h32 r270; Top Overlay "2" at 3675,3175 h32 r270
CN2: Top Overlay "38" at 6075,1205 h32 r270; Top Overlay "37" at 5975,1205 h32 r270; Top Overlay "1" at 5975,3175 h32 r270; Top Overlay "2" at 6075,3175 h32 r270